# EAGLE board logger (EAGLE 7.7.0)
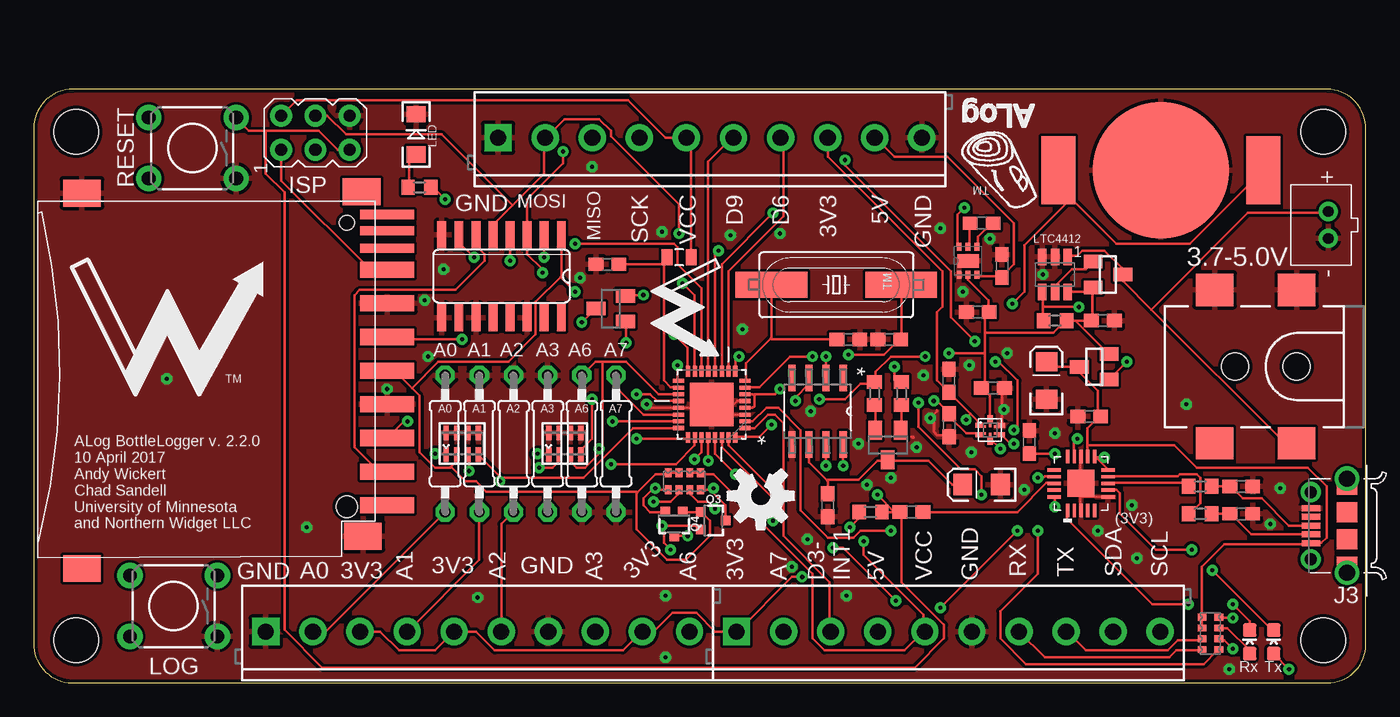
[diagram p0: board, top side]
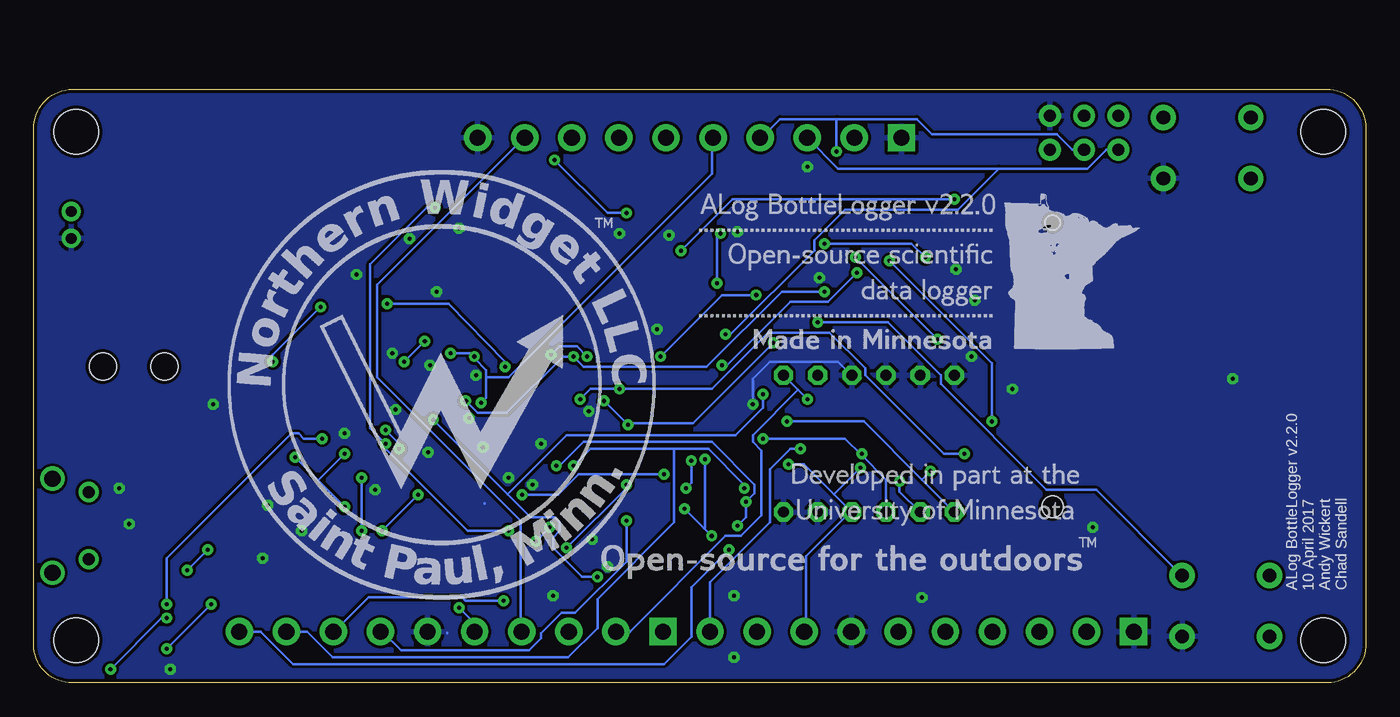
[diagram p1: board, bottom side, seen from below]

Size 99.05 x 44.12 mm. Coordinates in mm from the lower left corner, seen from the top.
Outline: 99.05,41.19 arc90 96.18,44.12 2.91,44.12 arc90 0,41.21 0,2.97 arc90 2.85,0 96.19,0 arc90 99.05,2.86 99.05,41.19
Copper layers (1*16): Top 0.035mm / dielectric 1.5mm / Bottom 0.035mm
Design rules "SparkFun *": minimum track width 8mil, minimum drill 12mil, track to track 8mil, track to pad 8mil, pad to pad 8mil, via to via 8mil, smd to smd 8mil, copper to edge 10mil, drill to drill 8mil, minimum pad ring 12mil, minimum via ring 10mil, stop-mask expansion 4mil, vias tented up to drill 25mil, thermal gap 10mil
Net classes: 0 default: width 0.203 mm, drill 0.305 mm; 1 power: width 0.305 mm, drill 0.508 mm; 2 gnd: width 0.61 mm, drill 0.508 mm, clearance 0.203 mm; 3 usbvcc: width 0.508 mm, drill 0.508 mm, clearance 0.152 mm; 4 aref: width 0.406 mm

## Footprints (pad centres in the part's own frame; a part is rotated, then mirrored left to right if it is on the bottom)
6-TMLF_SMD_PADS = smd 0.8 x 0.2: 1 -0.7,0.25; 2 -0.7,-0.25; 4 0.7,-0.25; 5 0.7,0.25 | smd 0.2 x 0.9: 3 0,-0.65; 6 0,0.65 | smd 0.6 x 0.4: 7 -0.8,0.35; 8 -0.8,-0.35; 10 0.8,-0.35; 11 0.8,0.35 | smd 0.4 x 0.6: 9 0,-0.8; 12 0,0.8
SON65P200X200X80-7N = smd 0.61 x 0.356: 1 -1.041,0.66; 2 -1.041,0; 3 -1.041,-0.66; 4 1.041,-0.66; 5 1.041,0; 6 1.041,0.66 | smd 0.991 x 1.6: 7 0,0
0207/10 = drill 0.813 octagon: 1 -5.08,0; 2 5.08,0
C0603 = smd 1.1 x 1: 1 -0.85,0; 2 0.85,0
CECJ-CTS-031817 = smd 0.406 x 1.1: A1 -1.2,-0.8; A2 -1.2,0.8; B1 -0.4,-0.8; B2 -0.4,0.8; C1 0.4,-0.8; C2 0.4,0.8; D1 1.2,-0.8; D2 1.2,0.8
EIA3216 = smd 1.4 x 1.6: A 1.4,0; C -1.4,0
LINX_BAT-HLD-012-SMT = smd 10.16 x 10.16: GND 0,0 | smd 2.54 x 5.08: POWER0 -7.62,0; POWER1 7.62,0
JST-PH-2-THM = drill 0.8 pad 1.422: 1 1,0; 2 -1,0
SOT23C = smd 1 x 1.4: 1 -0.95,-1.1; 2 0.95,-1.1; 3 0,1.1
R0603 = smd 1 x 1.1: 1 -0.85,0; 2 0.85,0
SCREWTERMINAL-3.5MM-8 = drill 1.2 pad 2.032 square: 1 0,0 | drill 1.2 pad 2.032: 2 3.5,0; 3 7,0; 4 10.5,0; 5 14,0; 6 17.5,0; 7 21,0; 8 24.5,0; 9 28,0; 10 31.5,0
AVRISP = drill 0.9 pad 1.626: 1 -1.27,2.54; 2 1.27,2.54; 3 -1.27,0; 4 1.27,0; 5 -1.27,-2.54; 6 1.27,-2.54
POWER_JACK_SMD = smd 2.8 x 2.4: GND 0,-5.7; P$4 6.1,-5.7; VIN0 0,5.7; VIN1 6.1,5.7 | hole 2.032: 0,0; 4.572,0
FRAMATOME_10118194-0001LF = smd 0.45 x 1.35: 1 -1.3,2.675; 2 -0.65,2.675; 3 0,2.675; 4 0.65,2.675; 5 1.3,2.675 | drill 0.9: P$6 -2.5,2.7; P$7 2.5,2.7 | drill 1.2: P$8 -3.5,0; P$9 3.5,0 | smd 1.5 x 1.55: P$10 -1,0; P$11 1,0; P$12 -3.05,0; P$13 3.05,0
STAND-OFF = hole 3.302: 0,0
0805 = smd 0.8 x 1.2: 1 -0.9,0; 2 0.9,0
LED-1206 = smd 1.2 x 1.4: A -1.5,0; C 1.5,0
LED-0603 = smd 1 x 1: A 0,-0.877; C 0,0.877
TACTILE-PTH = drill 1.016 pad 1.88: 1 -3.251,2.261; 2 3.251,2.261; 3 -3.251,-2.261; 4 3.251,-2.261
SO16 = smd 0.66 x 2.032: 1 -4.445,-3.073; 2 -3.175,-3.073; 3 -1.905,-3.073; 4 -0.635,-3.073; 5 0.635,-3.073; 6 1.905,-3.073; 7 3.175,-3.073; 8 4.445,-3.073; 9 4.445,3.073; 10 3.175,3.073; 11 1.905,3.073; 12 0.635,3.073; 13 -0.635,3.073; 14 -1.905,3.073; 15 -3.175,3.073; 16 -4.445,3.073
TSOT23-6 = smd 0.622 x 1.22: 1 -0.95,-1.31; 2 0,-1.31; 3 0.95,-1.31; 4 0.95,1.31; 5 0,1.31; 6 -0.95,1.31
QFN50P500X500X100-33N = smd 0.813 x 0.305: 1 -2.464,1.753; 2 -2.464,1.245; 3 -2.464,0.762; 4 -2.464,0.254; 5 -2.464,-0.254; 6 -2.464,-0.762; 7 -2.464,-1.245; 8 -2.464,-1.753; 17 2.464,-1.753; 18 2.464,-1.245; 19 2.464,-0.762; 20 2.464,-0.254; 21 2.464,0.254; 22 2.464,0.762; 23 2.464,1.245; 24 2.464,1.753 | smd 0.305 x 0.813: 9 -1.753,-2.464; 10 -1.245,-2.464; 11 -0.762,-2.464; 12 -0.254,-2.464; 13 0.254,-2.464; 14 0.762,-2.464; 15 1.245,-2.464; 16 1.753,-2.464; 25 1.753,2.464; 26 1.245,2.464; 27 0.762,2.464; 28 0.254,2.464; 29 -0.254,2.464; 30 -0.762,2.464; 31 -1.245,2.464; 32 -1.753,2.464 | smd 3.251 x 3.251: 33 0,0
SUPER-SOT3 = smd 1 x 1.4: 1 -0.95,-1.1; 2 0.95,-1.1; 3 0,1.1
SOT323 = smd 0.7 x 0.7: 1 -0.65,-0.925; 2 0.65,-0.925; 3 0,0.925
0603-ARC = smd 0.5 x 0.65: 1 -1.2,-0.625; 2 -0.4,-0.625; 3 0.4,-0.625; 4 1.2,-0.625; 5 1.2,0.625; 6 0.4,0.625; 7 -0.4,0.625; 8 -1.2,0.625
06132 = smd 1.2 x 4: 1 6.9,0.9; 2 4.4,0.9; 3 1.9,0.9; 4 -0.6,0.9; 5 -3.1,0.9; 6 -5.6,0.9; 7 -8.1,0.9; 9 9.4,0.9 | smd 0.7 x 4: 8 -9.7,0.9; CD -11,0.9; WP -12.2,0.9 | smd 2 x 2.8: GP -13.8,-21.8; GP2 14.1,-21.8; GP3 11.7,-0.9; GP4 -13.9,-1 | hole 1.1: -11.6,-2.1 | hole 1.6: 9.5,-2.1
21-0041B_8 = smd 1.981 x 0.533: 1 -2.464,1.905; 2 -2.464,0.635; 3 -2.464,-0.635; 4 -2.464,-1.905; 5 2.464,-1.905; 6 2.464,-0.635; 7 2.464,0.635; 8 2.464,1.905
QFN20 = smd 1 x 0.25: 1 -2.032,0.968; 2 -2.032,0.468; 3 -2.032,-0.032; 4 -2.032,-0.532; 5 -2.032,-1.032; 11 1.968,-1.032; 12 1.968,-0.532; 13 1.968,-0.032; 14 1.968,0.468; 15 1.968,0.968 | smd 0.25 x 1: 6 -1.032,-2.032; 7 -0.532,-2.032; 8 -0.032,-2.032; 9 0.468,-2.032; 10 0.968,-2.032; 16 0.968,1.968; 17 0.468,1.968; 18 -0.032,1.968; 19 -0.532,1.968; 20 -1.032,1.968 | smd 2 x 2: 21 -0.032,-0.032
HC49UP = smd 5.334 x 1.93: 1 -4.826,0; 2 4.826,0

## Placement (x,y rotation side)
3V3  MIC5380_LARGE_PADS  [6-TMLF_SMD_PADS]  71.11,18.8 0 top
5V_CHARGE_PUMP  5V  [SON65P200X200X80-7N]  69.47,31.37 90 top
A0  [0207/10]  30.6,17.78 270 top
A1  [0207/10]  33.14,17.78 270 top
A2  [0207/10]  35.68,17.78 270 top
A3  [0207/10]  38.22,17.78 270 top
A6  [0207/10]  40.76,17.78 270 top
A7  [0207/10]  43.3,17.78 270 top
ADECOUP  0.1uF  [C0603]  42.66,31.11 180 top
C1  0.1uF  [C0603]  74.03,17.91 90 top
C14  10nF  [CECJ-CTS-031817]  31.87,17.78 0 top
C15  10nF  [CECJ-CTS-031817]  39.49,17.78 0 top
C17  0.1uF  [C0603]  78.48,19.81 180 top
C21  10uF  [EIA3216]  75.3,22.48 90 top
C_BOOST_1  4.7uF  [C0603]  70.19,27.56 0 top
C_BOOST_2  2.2uF  [C0603]  70.48,34.16 0 top
C_BOOST_3  2.2uF  [C0603]  71.99,30.99 270 top
CLOCK_BATT  3V Backup Battery  [LINX_BAT-HLD-012-SMT]  83.81,38.1 0 top
CLOCK_BATT_DECOUP  0.1uF  [C0603]  59.05,13.21 270 top
CLOCK_BATT_DECOUPLE  10uF  [EIA3216]  70.47,14.73 180 top
CLOCK_CIN1  1uF  [C0603]  71.32,21.91 0 top
CLOCK_CIN2  1uF  [C0603]  68.05,22.45 90 top
CLOCK_CIN3  1uF  [C0603]  68.07,19.16 270 top
CN1  [JST-PH-2-THM]  96.26,34.04 90 top
COUT  1uF  [C0603]  79.49,26.92 0 top
COUT1  0.1uF  [C0603]  65.27,12.7 180 top
CX0  33pF  [C0603]  63.62,25.53 0 top
CX1  33pF  [C0603]  60.57,25.53 180 top
CX2  33pF  [C0603]  89.78,12.57 180 top
CX3  33pF  [C0603]  89.78,14.61 180 top
D1  BAT54C  [SOT23C]  63.51,17.69 180 top
D2  BAT54  [SOT23C]  42.92,27.81 90 top
D+  27ohm  [R0603]  86.73,14.61 0 top
D-  27ohm  [R0603]  86.73,12.57 0 top
H0  [SCREWTERMINAL-3.5MM-8]  17.26,3.81 0 top
H1  [SCREWTERMINAL-3.5MM-8]  52.26,3.81 0 top
H3  [SCREWTERMINAL-3.5MM-8]  34.53,40.51 0 top
ISP  AVRISP-6  [AVRISP]  20.94,40.89 90 top
J1  5.5x2.1mm Barrel  [POWER_JACK_SMD]  93.91,23.51 180 top
J3  10118194-0001LF  [FRAMATOME_10118194-0001LF]  97.65,11.68 90 top
JP1  STAND-OFF  [STAND-OFF]  3.17,3.17 0 top
JP2  STAND-OFF  [STAND-OFF]  95.88,40.96 90 top
JP3  STAND-OFF  [STAND-OFF]  95.88,3.17 90 top
JP4  STAND-OFF  [STAND-OFF]  3.17,40.96 0 top
L_LPF  10uH  [0805]  48,31.62 180 top
LED  [LED-1206]  28.44,40.77 90 top
LED1  Yellow  [LED-0603]  90.41,3.05 0 top
LED2  Blue  [LED-0603]  92.19,3.05 0 top
LOG  LOG  [TACTILE-PTH]  10.4,5.71 180 top
LOGO1  OSHW-LOGOM  [OSHW-LOGO-M]  54.06,13.9 180 top
LSHIFT  4050D  [SO16]  34.79,30.23 180 top
LTC4412  LTC4412ES6  [TSOT23-6]  75.94,30.35 180 top
MCU  ATMEGA328P-MU  [QFN50P500X500X100-33N]  50.41,20.7 180 top
Q1  FDN360P  [SUPER-SOT3]  79.87,30.35 270 top
Q2  FDN360P  [SUPER-SOT3]  78.86,23.5 90 top
Q3  310mA/60V/1.6Ω  [SOT323]  50.54,12.06 270 top
Q4  310mA/60V/1.6Ω  [SOT323]  47.62,11.81 180 top
R_LED  220  [R0603]  28.69,36.83 180 top
R_RESET  10k  [R0603]  62.22,12.7 180 top
RCKL1  220  [R0603]  62.52,21.5 90 top
RCLK2  220  [R0603]  64.52,21.5 90 top
RESET  Reset  [TACTILE-PTH]  11.8,39.75 180 top
RN1  1K  [0603-ARC]  87.49,3.68 90 top
RN2  3.3K  [0603-ARC]  48.38,14.99 180 top
RSTAT  470k  [R0603]  75.94,26.92 0 top
SD  SDMMC06132  [06132]  25.39,22.61 270 top
U1  DS3231MZ/V+T  [21-0041B_8]  58.28,20.19 270 top
U2  FT231X-Q  [QFN20]  77.84,14.86 90 top
U$1  NWLOGO  [NWLOGO]  9.9,26.04 0 top
U$2  ALOG_LOGO_V1_5.5MM  [ALOG_LOGO_V1_SMALL]  71.69,38.22 180 top
U$3  NWLOGO_MED  [NWLOGO_MED]  48.89,27.94 270 top
U$8  ALOG_BACK_SILK  [ALOG_BACK_SILK_GENERIC]  21.07,8.26 0 top
U$9  2.2.0  [2.2.0]  27.53,34.83 0 top
XTAL  8MHz  [HC49UP]  59.68,29.59 0 top

## Library data of the parts
3V3 = csandell
5V_CHARGE_PUMP = ti_by_element14; MPN: TPS60150DRVR; OC_FARNELL: -; OC_NEWARK: 45P8283; PACKAGE: SON-6; SUPPLIER: Texas Instruments
A0 A1-A3 A6 A7 ADECOUP C1 C17 C_BOOST_1-C_BOOST_3 CX0 CX1-CX3 R_LED = resistor
C14 C15 = rc-master-smd
C21 CLOCK_BATT_DECOUPLE = SparkFun-Passives
CLOCK_BATT U$1-U$3 U$8 U$9 = awickert
CLOCK_BATT_DECOUP CLOCK_CIN1-CLOCK_CIN3 COUT COUT1 D+ D- R_RESET RCKL1 RCLK2 RSTAT = rcl
CN1 ISP SD = adafruit
D1 D2 = semicon-smd-ipc
H0 H1 H3 = SparkFun-Connectors
J1 = SparkFun-Connectors; PROD_ID: CONN-08106; SF_ID: PRT-12748
J3 = 10118194-0001LF; AVAILABILITY: Good; DESCRIPTION: Conn Micro USB Type B RCP 5 POS 0.65mm Solder RA SMD 5 Terminal 1 Port T/R; MF: FCI; MP: 10118194-0001LF; PACKAGE: DIP-4 FCI; PRICE: 0.24 USD
JP1-JP4 L_LPF = SparkFun
LED LED1 LED2 = SparkFun-LED
LOG RESET = SparkFun-Electromechanical; PROD_ID: SWCH-08441
LOGO1 = SparkFun-Aesthetics
LSHIFT = 40xx
LTC4412 = logger
MCU = Atmel_By_element14_Batch_1-00; MPN: ATMEGA328P-MU; OC_FARNELL: 1748522; OC_NEWARK: 26R2526; PACKAGE: QFN-32; SUPPLIER: Atmel
Q1 Q2 = transistor-power
Q3 Q4 = SparkFun-DiscreteSemi; PROD_ID: TRANS-11151
RN1 RN2 = resistor-dil; OC_FARNELL: unknown; OC_NEWARK: unknown
U1 = Maxim-DS3231MZ_8-SOIC; MANUFACTURER_NAME: Maxim; MANUFACTURER_PART_NUMBER: DS3231MZ/V+T; VENDOR: Maxim
U2 = FT231X
XTAL = crystal; OC_FARNELL: unknown; OC_NEWARK: unknown

## Nets
5V: 5V_CHARGE_PUMP.3 C_BOOST_3.2 H1.4 H3.9
+3V3: 3V3.1 3V3.7 CLOCK_CIN2.1 H0.3 H0.5 H0.9 H1.1 H3.8 MCU.20
A0: A0.2 C14.C1 H0.2 MCU.23
A1: A1.2 C14.D1 H0.4 MCU.24
A2: A2.2 C15.A1 H0.6 MCU.25
A3: A3.2 C15.B1 H0.8 MCU.26
A6: A6.1 C15.C1 H0.10 MCU.19
A7: A7.1 C15.D1 H1.2 MCU.22
AVCC: ADECOUP.1 L_LPF.2 MCU.18
BAT: CLOCK_BATT_DECOUP.1 CLOCK_BATT_DECOUPLE.A D1.3 U1.6
CLK: H3.4 ISP.3 LSHIFT.3 MCU.17
CS-SD: LSHIFT.7 MCU.14
D3-INT1: H1.3 MCU.1
D4-SENSE_LDO_SWITCH: 3V3.4 3V3.10 5V_CHARGE_PUMP.6 MCU.2
D5_MANUAL_LOG: D2.2 MCU.9
D6-EXT: H3.7 MCU.10
D7-CLOCK_SD_SWITCH: 3V3.3 3V3.9 MCU.11
D8_LED: MCU.12 R_LED.1
D9-CS-EXT: H3.6 MCU.13
DI: H3.2 ISP.4 LSHIFT.5 MCU.15
DO: H3.3 ISP.1 MCU.16 SD.7
DTR: COUT1.1 U2.18
GND: 3V3.5 3V3.11 5V_CHARGE_PUMP.1 5V_CHARGE_PUMP.7 A0.1 A1.1 A2.1 A3.1 A6.2 A7.2 ADECOUP.2 C1.2 C14.A2 C14.B2 C14.C2 C14.D2 C15.A2 C15.B2 C15.C2 C15.D2 C17.2 C21.C C_BOOST_1.1 C_BOOST_3.1 CLOCK_BATT.GND CLOCK_BATT_DECOUP.2 CLOCK_BATT_DECOUPLE.C CLOCK_CIN1.2 CLOCK_CIN2.2 CLOCK_CIN3.2 CN1.2 COUT.2 CX0.1 CX1.1 CX2.1 CX3.1 H0.1 H0.7 H1.6 H3.1 H3.10 ISP.6 J1.GND J1.P$4 J3.5 LED.C LOG.1 LSHIFT.8 LSHIFT.9 LSHIFT.11 LSHIFT.14 LTC4412.2 LTC4412.3 MCU.3 MCU.5 MCU.21 MCU.33 RESET.1 SD.3 SD.6 SD.GP SD.GP3 U1.5 U2.3 U2.6 U2.13 U2.21
INT0: D2.1 MCU.32 U1.3
LED+: LED.A R_LED.2
N$1: D1.1 RCLK2.1
N$2: D-.1 U2.9
N$3: CX3.2 D+.2 J3.3
N$4: CX2.2 D-.2 J3.2
N$5: LED2.A RN1.4
N$6: LED2.C U2.7
N$7: LTC4412.4 Q2.1 RSTAT.1
N$8: LTC4412.5 Q1.1
N$9: LED1.A RN1.3
N$10: LED1.C U2.14
N$11: D2.3 LOG.3
N$14: 5V_CHARGE_PUMP.4 C_BOOST_2.2
N$15: 5V_CHARGE_PUMP.5 C_BOOST_2.1
N$16: D+.1 U2.8
N$17: C1.1 U2.10 U2.11 U2.20
N$27: RN1.1 U2.17
N$29: RN1.2 U2.1
N$67: D1.2 RCKL1.1
RESET: COUT1.2 ISP.5 MCU.29 R_RESET.1 RESET.3
RTC_BATT: CLOCK_BATT.POWER0 CLOCK_BATT.POWER1 RCLK2.2
RX-I: H1.7 MCU.30 RN1.8
SCL: H1.10 Q3.2 RN2.6 U1.8
SCL_MCU: MCU.28 Q3.3 RN2.8
SD_CLK: LSHIFT.2 SD.5
SD_CS: LSHIFT.6 SD.1
SD_DI: LSHIFT.4 SD.2
SDA: H1.9 Q4.2 RN2.5 U1.7
SDA_MCU: MCU.27 Q4.3 RN2.7
TX-O: H1.8 MCU.31 RN1.7
VBAT: CN1.1 J1.VIN0 LTC4412.1 Q1.3
VCC: 3V3.6 3V3.12 5V_CHARGE_PUMP.2 C14.A1 C_BOOST_1.2 CLOCK_CIN1.1 COUT.1 H1.5 H3.5 ISP.2 L_LPF.1 LTC4412.6 MCU.4 MCU.6 Q1.2 Q2.2 R_RESET.2 RCKL1.2 RN2.1 RN2.2 RSTAT.2
VDD: 3V3.2 3V3.8 C14.B1 CLOCK_CIN3.1 LSHIFT.1 Q3.1 Q4.1 RN2.3 RN2.4 SD.4 U1.2
VUSB: C17.1 C21.A J3.1 Q2.3 RN1.5 RN1.6 U2.12
X0: CX0.2 MCU.7 XTAL.2
X1: CX1.2 MCU.8 XTAL.1

## Tracks (layer width: path | path; a pad name or v marks a point on that pad's centre or on a via)
5V
  Top 0.203: H3.9 62.6,40.51 64,39.12 67.93,39.12 72.89,34.16 72.89,31.11 72,30.23 C_BOOST_3.2 71.87,30.23 70.22,30.23 5V_CHARGE_PUMP.3
  Bottom 0.203: H1.4 62.86,3.81 62.86,12.06 73.52,22.73 73.52,29.59 62.6,40.51 H3.9
+3V3  (via drill 0.3)
  Top 0.203: H0.3 25.77,3.81 27.17,2.41 29.83,2.41 31.23,3.81 H0.5 32.88,3.81 34.28,2.41 43.8,2.41 45.2,3.81 H0.9 46.09,3.81 47.49,5.21 49.27,5.21 50.66,3.81 H1.1 52.31,3.81 56.38,7.87 v57.14,7.87 | H3.8 59.05,40.51 59.05,39.12 67.55,30.61 67.55,27.94 67.17,27.56 67.17,22.48 67.93,21.72 CLOCK_CIN2.1 68.06,21.59 69.65,20 | 3V3.1 70.47,19.05 3V3.7 70.22,19.18 70.22,19.43 69.65,20 | 69.65,20 69.33,19.68 v69.33,19.56 | MCU.20 46.34,20.95 45.84,21.46 v44.82,21.46
  Bottom 0.203: 63.81,14.03 62.09,12.32 60.32,12.32 59.93,11.94 59.93,11.3 60.44,10.79 60.44,10.03 58.28,7.87 v57.14,7.87 | 63.81,14.03 v69.33,19.56 | v44.82,21.46 44.82,20.45 46.85,18.41 59.43,18.41 63.81,14.03
A0  (via drill 0.3)
  Top 0.203: v43.04,19.43 47.87,19.43 MCU.23 | v32.38,15.75 32.38,16.89 C14.C1 | H0.2 21.71,3.81 A0.2
  Bottom 0.203: v43.04,19.43 37.33,19.43 33.01,15.11 | A0.2 33.01,15.11 | 33.01,15.11 v32.38,15.75
A1  (via drill 0.3)
  Top 0.203: 33.01,16.89 C14.D1 33.14,16.89 34.72,15.3 | 33.01,14.22 33.14,14.1 A1.2 33.14,9.14 27.8,3.81 H0.4 | 34.72,15.3 34.79,15.24 40.88,15.24 44.57,18.92 47.87,18.92 MCU.24 | v34.66,14.99 34.66,15.24 34.72,15.3
  Bottom 0.203: v34.66,14.99 34.66,14.22 A1.2
A2  (via drill 0.3)
  Top 0.203: v44.82,18.16 48.63,18.16 MCU.25 | v37.46,17.02 38.22,17.02 C15.A1 | A2.2 34.79,11.81 34.79,3.81 H0.6
  Bottom 0.203: v44.82,18.16 38.73,18.16 37.52,16.95 | 37.52,16.95 35.68,15.11 A2.2 | v37.46,17.02 37.52,16.95
A3  (via drill 0.3)
  Top 0.203: v42.92,16.26 47.74,16.26 49.14,17.65 49.14,18.16 MCU.26 | v37.58,16 38.6,16 38.98,16.38 38.98,16.89 C15.B1
  Bottom 0.203: v42.92,16.26 41.77,16.26 39.55,14.03 | 39.55,14.03 A3.2 38.34,12.7 41.65,9.4 41.65,3.81 H0.8 | 39.55,14.03 v37.58,16
A6  (via drill 0.3)
  Top 0.203: MCU.19 46.47,21.46 44.06,23.88 42.28,23.88 | 42.28,23.88 41.77,23.88 A6.1 | 42.22,17.21 42.28,17.27 42.28,23.88 | 42.22,17.21 41.01,16 40.38,16 40,16.38 40,16.89 C15.C1 | 42.22,17.21 v42.03,17.4
  Bottom 0.203: v42.03,17.4 42.79,17.4 44.31,15.88 44.31,11.94 48.76,7.49 H0.10
A7  (via drill 0.3)
  Top 0.203: MCU.22 45.33,19.94 43.3,21.97 A7.1 | v41.52,21.08 41.52,18.16 40.76,17.4 40.76,17.02 C15.D1
  Bottom 0.203: A7.1 42.22,21.78 | 42.22,21.78 v41.52,21.08 | H1.2 54.73,3.81 47.62,10.92 46.47,10.92 44.95,12.45 44.95,17.27 45.58,17.91 45.58,18.41 42.22,21.78
AVCC
  Top 0.203: 46.85,31.11 46.85,31.5 46.98,31.62 L_LPF.2 46.85,31.11 | 46.85,31.11 46.85,22.48 47.36,21.97 47.87,21.97 MCU.18 | 46.85,31.11 ADECOUP.1
BAT
  Top 0.203: CLOCK_BATT_DECOUPLE.A 68.32,14.73 66.54,16.51 63.62,16.51 D1.3 63.49,16.51 62.73,16.51 61.33,15.11 59.05,15.11 58.98,15.05 | CLOCK_BATT_DECOUP.1 59.05,14.99 58.98,15.05 | 58.98,15.05 57.65,16.38 U1.6
CLK  (via drill 0.3)
  Top 0.203: v39.36,39.5 39.36,38.61 36.69,35.94 LSHIFT.3 36.69,31.88 37.84,30.73 v37.84,30.48 | v47.87,23.62 47.87,22.48 MCU.17
  Bottom 0.203: ISP.3 21.83,39.62 22.98,40.77 32.25,40.77 33.39,41.91 39.36,41.91 | 39.36,41.91 43.55,41.91 44.95,40.51 H3.4 | 39.36,41.91 v39.36,39.5 | v47.87,23.62 47.49,23.62 42.79,28.32 40,28.32 v37.84,30.48
CS-SD  (via drill 0.3)
  Top 0.203: MCU.14 49.65,29.34 47.87,31.11 47.87,32.38 47.62,32.64 v40.25,32.64 | v32.76,31.62 31.61,32.77 LSHIFT.7
  Bottom 0.203: v40.25,32.64 33.77,32.64 v32.76,31.62
D3-INT1
  Top 0.203: MCU.1 52.95,18.92 53.58,18.92 54.6,19.94 55.11,19.94 55.74,19.3 55.74,10.92 59.17,7.49 59.17,3.81 H1.3
D4-SENSE_LDO_SWITCH  (via drill 0.3)
  Top 0.203: 3V3.4 71.87,18.54 3V3.10 72,18.41 72.63,17.78 v72.89,17.78 | v69.2,35.31 68.7,34.8 68.7,32.51 5V_CHARGE_PUMP.6 | v63.74,11.3 61.46,11.3 60.95,10.79 59.05,10.79 57.01,12.83 57.01,18.8 55.36,20.45 54.47,20.45 53.46,19.43 52.95,19.43 MCU.2
  Bottom 0.203: v69.2,35.31 69.84,35.31 74.03,31.11 74.03,18.92 v72.89,17.78 72.89,17.4 66.79,11.3 v63.74,11.3
D5_MANUAL_LOG  (via drill 0.3)
  Top 0.203: v52.44,24.26 52.19,24 52.19,23.24 MCU.9 | v45.33,28.83 44.06,28.83 D2.2
  Bottom 0.203: v52.44,24.26 47.87,28.83 v45.33,28.83
D6-EXT
  Top 0.203: MCU.10 51.68,23.24 51.68,30.61 55.74,34.67 55.74,40.39 55.62,40.51 H3.7
D7-CLOCK_SD_SWITCH  (via drill 0.3)
  Top 0.203: 3V3.9 3V3.3 71.11,18.16 v71.87,17.4 | MCU.11 51.17,31.11 v54.98,34.92 | v60.32,38.86 60.32,38.48 68.19,30.61 68.19,27.18 v69.97,25.4 | v71.49,23.88 71.74,23.88 73.14,22.48 73.14,19.05 v72.89,18.8
  Bottom 0.203: v54.98,34.92 56.38,34.92 v60.32,38.86 | v71.49,23.88 v69.97,25.4 | v72.89,18.8 71.87,17.78 v71.87,17.4
D8_LED  (via drill 0.3)
  Top 0.203: MCU.12 50.66,31.88 v50.92,32.13 | v30.6,35.94 29.71,36.83 R_LED.1
  Bottom 0.203: v50.92,32.13 47.11,35.94 v30.6,35.94
D9-CS-EXT
  Top 0.203: MCU.13 50.16,38.73 51.93,40.51 H3.6
DI  (via drill 0.3)
  Top 0.203: v48.25,29.72 49.14,28.83 49.14,23.24 MCU.15 | v48,33.4 48,35.56 42.92,40.64 42.92,41.02 42.03,41.91 39.49,41.91 38.09,40.51 H3.2 37.96,40.51 37.96,37.85 35.61,35.5 | LSHIFT.5 34.15,34.04 35.61,35.5 | ISP.4 21.83,42.16 23.23,40.77 30.34,40.77 35.61,35.5
  Bottom 0.203: v48.25,29.72 48.25,33.15 v48,33.4
DO  (via drill 0.3)
  Top 0.203: ISP.1 18.4,37.34 25.01,30.73 26.28,30.73 SD.7 | v47.62,25.91 48.63,24.89 48.63,23.24 MCU.16
  Bottom 0.203: ISP.1 19.29,39.62 20.69,38.23 27.29,38.23 | 27.29,38.23 39.23,38.23 H3.3 | v47.62,25.91 47.23,25.91 41.01,32.13 41.01,32.89 38.73,35.18 30.34,35.18 27.29,38.23
DTR
  Top 0.203: COUT1.1 73.14,12.7 75.3,14.86 75.81,14.86 U2.18
GND  (via drill 0.3)
  Top 0.203: MCU.33 50.16,20.45 MCU.21 45.84,20.45 v45.58,20.7 | 51.3,19.94 51.04,19.94 50.41,20.57 MCU.33 | 51.3,19.94 MCU.3 | MCU.5 52.31,20.95 51.3,19.94 | 51.3,19.94 MCU.33 | 65.27,18.29 65.37,18.24 | 65.37,18.24 65.43,18.21 | 68.02,18.26 68.19,18.16 67.93,18.41 67.17,18.41 66.92,18.67 66.92,19.43 v66.66,19.68 67.17,20.19 67.16,20.25 | 67.93,18.35 67.93,18.16 CLOCK_CIN3.2 | 65.39,18.29 65.37,18.24 | 77.84,13.84 77.84,14.73 U2.21 | 77.84,13.84 77.84,12.83 U2.3 | U2.13 77.84,16.76 77.84,14.86 U2.21 | 77.84,13.84 79.87,13.84 U2.6 | 77.84,13.84 U2.21 | 77.97,14.61 U2.21 | U2.21 78.22,13.97 78.08,13.97 | 77.97,14.48 U2.21 | U2.21 77.71,14.73 77.67,14.62 | 3V3.5 71.87,19.05 3V3.11 72,19.18 72,21.72 72.13,21.84 CLOCK_CIN1.2
  Bottom 0.203: H1.6 69.84,3.81 69.86,3.71 | 68.32,3.68 68.32,3.71 | 65.52,13.34 65.52,13.33 | 14.21,37.47 RESET.1 | H3.1 34.15,40.77 34.15,40.61 | v45.58,20.7 45.58,22.61 44.31,23.88 39.23,23.88 A3.1
  other vias: 71.11,33.02 69.59,23.62 72.38,24.51 82.03,9.27 81.65,13.21 40.63,30.1 29.33,24.26 26.28,21.84 29.07,28.45 46.98,6.48 20.31,11.56 55.49,33.4 67.43,33.78 75.94,18.54 51.81,33.27 79.11,11.3 66.16,22.86 46.98,1.91 9.9,22.61 30.47,30.73 33.01,6.35 69.71,17.14 41.52,38.35 46.73,33.53 65.65,17.53 61.33,17.78 57.77,20.19 52.7,26.29 73.65,14.35 61.97,14.73 88.89,1.02 69.08,29.08 72.13,20.32 85.71,20.7 63.74,15.24 60.44,6.48 57.52,10.67 56.38,8.64 75.05,30.35 92.7,14.48 91.94,11.81
  pour Bottom: -0.33,44.45 -0.33,-0.32 99.37,-0.32 99.37,44.45
  pour Top: -0.65,44.77 -0.65,-0.64 99.68,-0.64 99.68,44.77
INT0  (via drill 0.3)
  Top 0.203: v54.85,19.18 53.97,18.29 52.19,18.29 MCU.32 | v56.63,20.95 56.63,21.21 57.65,22.23 U1.3 | v44.06,25.27 44.06,26.8 D2.1
  Bottom 0.203: v56.63,20.95 v54.85,19.18 54.85,19.3 50.03,19.3 v44.06,25.27
LED+
  Top 0.203: LED.A 27.93,38.99 27.93,36.83 R_LED.2
N$1
  Top 0.203: RCLK2.1 64.51,20.57 64.51,18.8 D1.1
N$2
  Top 0.203: U2.9 79.87,15.37 85.08,15.37 85.21,15.49 86.48,15.49 86.73,15.24 86.73,13.34 85.97,12.57 D-.1
N$3
  Top 0.203: D+.2 CX3.2 89.02,14.61 89.91,13.72 91.3,13.72 93.33,11.68 J3.3
N$4
  Top 0.203: D-.2 CX2.2 89.02,12.57 90.54,11.05 94.86,11.05 J3.2
N$5  (via drill 0.3)
  Top 0.203: v89.14,4.83 88.13,4.83 RN1.4 | v93.33,1.02 92.19,2.16 LED2.A
  Bottom 0.203: v89.14,4.83 89.52,4.83 v93.33,1.02
N$6  (via drill 0.3)
  Top 0.203: v87.62,8.38 92.19,3.81 LED2.C | v86.1,9.91 83.43,9.91 80.76,12.57 80.76,14.1 80.51,14.35 79.87,14.35 U2.7
  Bottom 0.203: v86.1,9.91 v87.62,8.38
N$7  (via drill 0.3)
  Top 0.203: 75.05,27.94 75.05,28.96 LTC4412.4 | 75.05,27.94 75.05,26.92 RSTAT.1 | v81.27,23.88 80,22.61 Q2.1 | 75.05,27.94 v77.71,27.94
  Bottom 0.203: v81.27,23.88 81.27,24.38 v77.71,27.94
N$8
  Top 0.203: LTC4412.5 75.94,29.46 77.21,30.73 78.22,30.73 78.73,31.24 Q1.1
N$9
  Top 0.203: RN1.3 88.13,4.06 88.76,4.06 90.41,2.41 LED1.A
N$10  (via drill 0.3)
  Top 0.203: v77.59,18.16 77.33,17.91 77.33,16.89 U2.14 | v89.14,5.84 90.41,4.57 LED1.C
  Bottom 0.203: v77.59,18.16 78.98,18.16 79.36,18.54 79.87,18.54 89.14,9.27 v89.14,5.84
N$11  (via drill 0.3)
  Top 0.203: v40.76,26.8 41.77,27.81 D2.3
  Bottom 0.203: v40.76,26.8 35.55,26.8 31.61,22.86 31.61,22.23 23.74,14.35 20.06,14.35 13.71,8 LOG.3
N$14
  Top 0.203: 5V_CHARGE_PUMP.4 70.22,32.51 70.22,33.15 71.24,34.16 C_BOOST_2.2
N$15
  Top 0.203: 5V_CHARGE_PUMP.5 69.59,32.51 69.59,34.16 C_BOOST_2.1
N$16
  Top 0.203: U2.8 79.87,14.86 85.59,14.86 85.84,14.61 D+.1
N$17  (via drill 0.3)
  Top 0.203: v75.94,13.08 75.94,13.72 U2.20 | 78.98,16.76 v79.62,16.76 | 78.98,16.76 79.87,15.88 U2.10 | 78.98,16.76 U2.11 | v75.94,17.02 74.03,17.02 C1.1
  Bottom 0.203: v79.62,16.76 77.91,15.05 | 77.91,15.05 v75.94,13.08 | 77.91,15.05 v75.94,17.02
N$27  (via drill 0.3)
  Top 0.203: v74.67,11.3 74.67,8.13 71.87,5.33 71.87,3.3 73.78,1.4 86.98,1.4 88,2.41 RN1.1 | v74.67,15.24 75.05,15.24 75.17,15.37 75.81,15.37 U2.17
  Bottom 0.203: v74.67,11.3 v74.67,15.24
N$29  (via drill 0.3)
  Top 0.203: v89.14,2.54 88.51,3.17 88.13,3.17 RN1.2 | v85.84,5.84 83.17,5.84 76.82,12.19 76.82,12.83 U2.1
  Bottom 0.203: v85.84,5.84 v89.14,2.54
N$67
  Top 0.203: RCKL1.1 62.6,20.57 62.6,18.8 D1.2
RESET  (via drill 0.3)
  Top 0.203: 64,12.7 R_RESET.1 | ISP.5 22.6,39.62 21.2,41.02 17.26,41.02 | 17.26,41.02 15.99,41.02 15.1,41.91 RESET.3 | 17.26,41.02 17.26,37.85 18.66,36.45 18.66,3.94 21.45,1.14 65.52,1.14 67.68,3.3 67.68,4.32 64.51,7.49 64.51,12.7 COUT1.2 64,12.7 | MCU.29 50.66,17.02 v52.19,15.49 | 64,12.7 v62.73,13.97
  Bottom 0.203: v52.19,15.49 58.54,15.49 60.06,13.97 v62.73,13.97
RTC_BATT  (via drill 0.3)
  Top 0.203: v64,23.5 64,22.48 64.12,22.35 64.51,22.35 RCLK2.2 | v72.76,28.19 73.65,29.08 73.65,32.51 77.21,36.07 CLOCK_BATT.POWER0 77.21,35.94 80.51,32.64 85.97,32.64 CLOCK_BATT.POWER1
  Bottom 0.203: v64,23.5 64,23.88 68.19,28.19 v72.76,28.19
RX-I  (via drill 0.3)
  Top 0.203: RN1.8 86.86,2.41 84.95,2.41 84.44,1.91 75.17,1.91 H1.7 | MCU.30 51.17,17.53 54.98,13.72 v54.98,12.06
  Bottom 0.203: v54.98,12.06 54.98,9.02 58.79,5.21 59.81,5.21 61.33,3.68 61.33,3.3 62.22,2.41 71.74,2.41 73.14,3.81 H1.7
SCL  (via drill 0.3)
  Top 0.203: v46.09,13.46 47.36,13.46 47.87,13.97 47.87,14.35 RN2.6 | 46.85,11.68 49.27,11.68 49.52,11.43 Q3.2 | v60.19,16.13 U1.8 | v47.36,9.91 46.85,10.41 46.85,11.68 | 46.85,11.68 v46.73,11.68
  Bottom 0.203: v46.73,11.68 46.09,12.32 v46.09,13.46 45.46,14.1 45.46,14.73 48.63,17.91 58.16,17.91 59.93,16.13 v60.19,16.13 | H1.10 82.16,3.81 79.75,1.4 52.19,1.4 50.16,3.43 50.16,7.11 v47.36,9.91
SCL_MCU  (via drill 0.3)
  Top 0.203: 50.34,14.29 51.43,13.21 51.43,12.06 Q3.3 | 50.34,14.29 50.28,14.35 49.65,14.35 RN2.8 | v50.16,16.51 MCU.28 | 50.34,14.29 v50.54,14.48
  Bottom 0.203: v50.16,16.51 50.16,14.86 v50.54,14.48
SD_CLK  (via drill 0.3)
  Top 0.203: v37.96,31.62 LSHIFT.2 | v31.87,25.53 26.53,25.53 26.41,25.65 SD.5
  Bottom 0.203: v31.87,25.53 v37.96,31.62
SD_CS
  Top 0.203: LSHIFT.6 32.88,32.51 33.52,31.88 33.52,31.37 31.36,29.21 24.25,29.21 23.87,28.83 23.87,17.53 25.64,15.75 26.28,15.75 SD.1
SD_DI  (via drill 0.3)
  Top 0.203: v35.42,31.37 LSHIFT.4 | v27.8,19.43 27.55,19.43 26.41,18.29 SD.2
  Bottom 0.203: v35.42,31.37 27.8,23.75 v27.8,19.43
SDA  (via drill 0.3)
  Top 0.203: 46.22,14.35 45.96,14.35 45.33,13.72 45.33,13.21 45.84,12.7 46.85,12.7 Q4.2 | 46.22,14.35 47.11,14.35 RN2.5 | v46.22,14.48 46.22,14.35 | U1.7 v58.92,16.13
  Bottom 0.203: v46.22,14.48 46.22,14.73 48.89,17.4 51.43,17.4 | 51.43,17.4 57.65,17.4 v58.92,16.13 | H1.9 78.73,3.81 76.82,1.91 59.3,1.91 57.14,4.06 57.14,6.22 51.43,11.94 51.43,17.4
SDA_MCU  (via drill 0.3)
  Top 0.203: v50.66,12.95 50.16,13.46 49.39,13.46 48.89,13.97 48.89,14.35 RN2.7 | v48.63,10.92 47.62,10.92 Q4.3 | MCU.27 49.65,17.14 v49.14,16.64
  Bottom 0.203: v48.63,10.92 49.2,11.49 | 49.2,11.49 v50.66,12.95 | v49.14,16.64 49.14,11.56 49.2,11.49
TX-O  (via drill 0.3)
  Top 0.203: RN1.7 86.86,3.17 85.08,3.17 84.32,2.41 78.22,2.41 76.82,3.81 H1.8 | v54.98,14.73 54.6,14.73 51.68,17.65 51.68,18.16 MCU.31 | v59.43,10.03 60.19,10.03 v64.12,6.1
  Bottom 0.203: v54.98,14.73 54.98,14.48 v59.43,10.03 | v64.12,6.1 66.92,6.1 67.17,6.35 74.16,6.35 76.7,3.81 H1.8
VBAT
  Top 0.203: 83.11,27.75 81.02,29.84 81.02,30.35 Q1.3 80.89,30.35 80.89,30.86 79.62,32.13 77.97,32.13 77.59,31.75 76.95,31.75 LTC4412.1 | 83.11,27.75 92.95,17.91 93.84,17.91 J1.VIN0 | 83.11,27.75 90.29,34.92 96.26,34.92 CN1.1
VCC  (via drill 0.3)
  Top 0.203: L_LPF.1 48.89,31.62 48.89,40.26 48.63,40.51 H3.5 46.98,40.51 44.19,43.31 19.55,43.31 ISP.2 | 3V3.6 3V3.12 71.11,21.34 70.73,21.72 | 70.73,26.04 70.73,27.43 70.6,27.56 70.6,27.69 C_BOOST_1.2 70.98,27.62 70.98,28.45 69.47,29.96 5V_CHARGE_PUMP.2 | 70.73,26.04 70.73,24.51 | 70.73,24.51 70.73,21.72 | v66.28,24.26 63.74,24.26 62.6,23.11 62.6,22.35 RCKL1.2 62.47,22.23 61.46,22.23 60.32,21.08 v58.41,21.08 | 70.73,24.51 v68.06,24.51 | MCU.4 53.46,20.45 53.58,20.57 53.58,21.34 53.52,21.4 | 53.52,21.4 53.46,21.46 MCU.6 | v55.49,21.84 55.11,21.46 53.58,21.46 53.52,21.4 | 70.73,21.72 CLOCK_CIN1.1 | v60.7,11.56 61.33,12.19 61.33,12.7 R_RESET.2 | v61.71,10.54 61.71,9.53 66.16,5.08 66.16,3.81 | v65.78,20.83 65.78,19.05 68.95,15.88 69.97,15.88 70.47,15.37 v70.47,13.97 | v67.43,5.59 v73.14,11.3 | 70.73,26.04 75.81,26.04 76.7,26.92 RSTAT.2 77.46,26.92 | 77.46,26.92 COUT.1 78.73,26.92 78.73,29.08 | 77.46,26.92 79.87,24.51 Q2.2 | 78.73,29.08 78.73,29.34 Q1.2 78.73,29.08 | RN2.2 48.89,15.62 49.52,15.62 RN2.1 49.65,15.49 50.54,15.49 57.9,8.13 57.9,3.3 58.79,2.41 64.76,2.41 66.16,3.81 | 66.16,3.81 H1.5 | v29.83,17.02 30.6,17.02 C14.A1 | 78.73,29.08 76.95,29.08 LTC4412.6
  Bottom 0.203: v58.41,21.08 57.65,21.84 v55.49,21.84 48.63,21.84 44.44,26.04 39.87,26.04 37.2,23.37 37.2,22.86 31.36,17.02 v29.83,17.02 | v68.06,24.51 66.54,24.51 v66.28,24.26 66.28,24.13 65.39,23.24 65.39,22.73 | v61.71,10.54 v60.7,11.56 | 65.39,22.73 65.39,21.21 v65.78,20.83 | v73.14,11.3 v70.47,13.97 | v67.43,5.59 66.28,4.45 66.28,3.81 H1.5 | 65.39,22.73 63.74,22.73 48.63,37.85 48.63,40.51 H3.5
VDD  (via drill 0.3)
  Top 0.203: 3V3.8 70.47,18.54 3V3.2 70.22,18.54 69.33,18.54 68.19,19.68 68.19,19.94 CLOCK_CIN3.1 68.06,20.07 67.17,20.95 v66.92,20.95 | RN2.3 47.87,15.62 47.23,15.62 RN2.4 47.11,15.49 46.22,15.49 44.89,14.16 | Q4.1 48.38,12.7 49.52,12.7 Q3.1 49.65,12.7 50.28,12.06 50.28,10.92 48.5,9.14 47.11,9.14 44.82,11.43 44.82,14.1 44.89,14.16 | v58.92,24.26 U1.2 | 31.04,16.07 30.98,16 29.83,16 28.69,17.14 28.69,21.34 28.12,21.91 | 31.04,16.07 31.36,16.38 31.36,16.89 C14.B1 | 28.12,21.91 26.91,23.11 26.41,23.11 SD.4 | LSHIFT.1 39.23,30.23 39.17,30.16 | 39.17,30.16 37.33,28.32 37.33,25.91 35.3,23.88 30.09,23.88 28.12,21.91 | 31.04,16.07 32.12,14.99 32.88,14.99 33.65,14.22 44.82,14.22 44.89,14.16 | 39.17,30.16 v40.25,29.08
  Bottom 0.203: v66.92,20.95 66.03,20.07 63.87,20.07 59.68,24.26 v58.92,24.26 58.16,23.5 49.01,23.5 43.42,29.08 v40.25,29.08
VUSB
  Top 0.203: RN1.6 86.86,4.19 86.86,4.83 RN1.5 86.86,4.95 86.86,8.64 88.51,10.29 94.86,10.29 J3.1 94.99,10.41 95.75,10.41 96.13,10.79 96.13,14.61 94.73,16 86.48,16 84.83,17.65 78.35,17.65 | 77.33,23.5 75.68,23.5 C21.A | 78.35,17.65 78.35,18.92 79.24,19.81 C17.1 79.11,19.81 79.11,21.72 77.33,23.5 | 78.35,17.65 78.35,16.89 U2.12 | 77.33,23.5 Q2.3
X0  (via drill 0.3)
  Top 0.203: v57.9,24.26 56.25,24.26 53.97,21.97 52.95,21.97 MCU.7 | v60.57,24.38 63.24,24.38 64.38,25.53 CX0.2 64.51,25.53 XTAL.2
  Bottom 0.203: v57.9,24.26 58.66,25.02 59.93,25.02 v60.57,24.38
X1
  Top 0.203: 54.79,25.59 54.85,25.65 XTAL.1 | 54.79,25.59 52.95,23.75 52.95,22.48 MCU.8 | CX1.2 54.85,25.53 54.79,25.59

## Text on the board
tPlace: MISO | TM | GND | MOSI | SCK | VCC | D9 | D6 | 3V3 | 5V | GND | 1 | 3.7-5.0V | TM | TM | A0 | A1 | A2 | A3 | A6 | A7 | (3V3) | ALog BottleLogger v. 2.2.0 / 10 April 2017 / Andy Wickert / Chad Sandell / University of Minnesota / and Northern Widget LLC | GND | A0 | 3V3 | A1 | 3V3 | A2 | GND | A3 | 3V3 | A6 | 3V3 | A7 | D3- / INT1 | 5V | VCC | GND | RX | TX | SDA | SCL | Rx | Tx
bPlace: ALog BottleLogger v2.2.0 / 10 April 2017 / Andy Wickert / Chad Sandell